# EAGLE board mrShark 03.a (EAGLE 5.11)
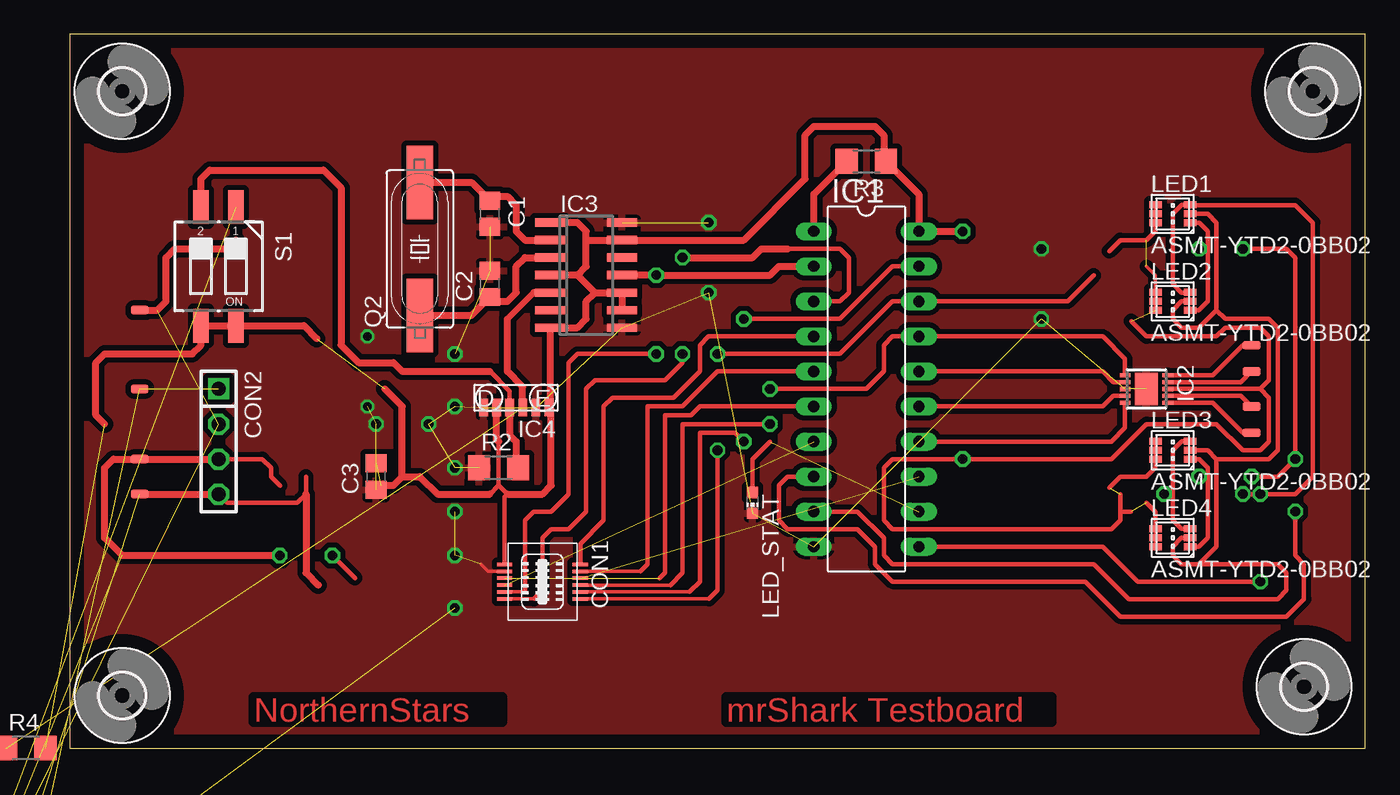
[diagram p0: board, top side]
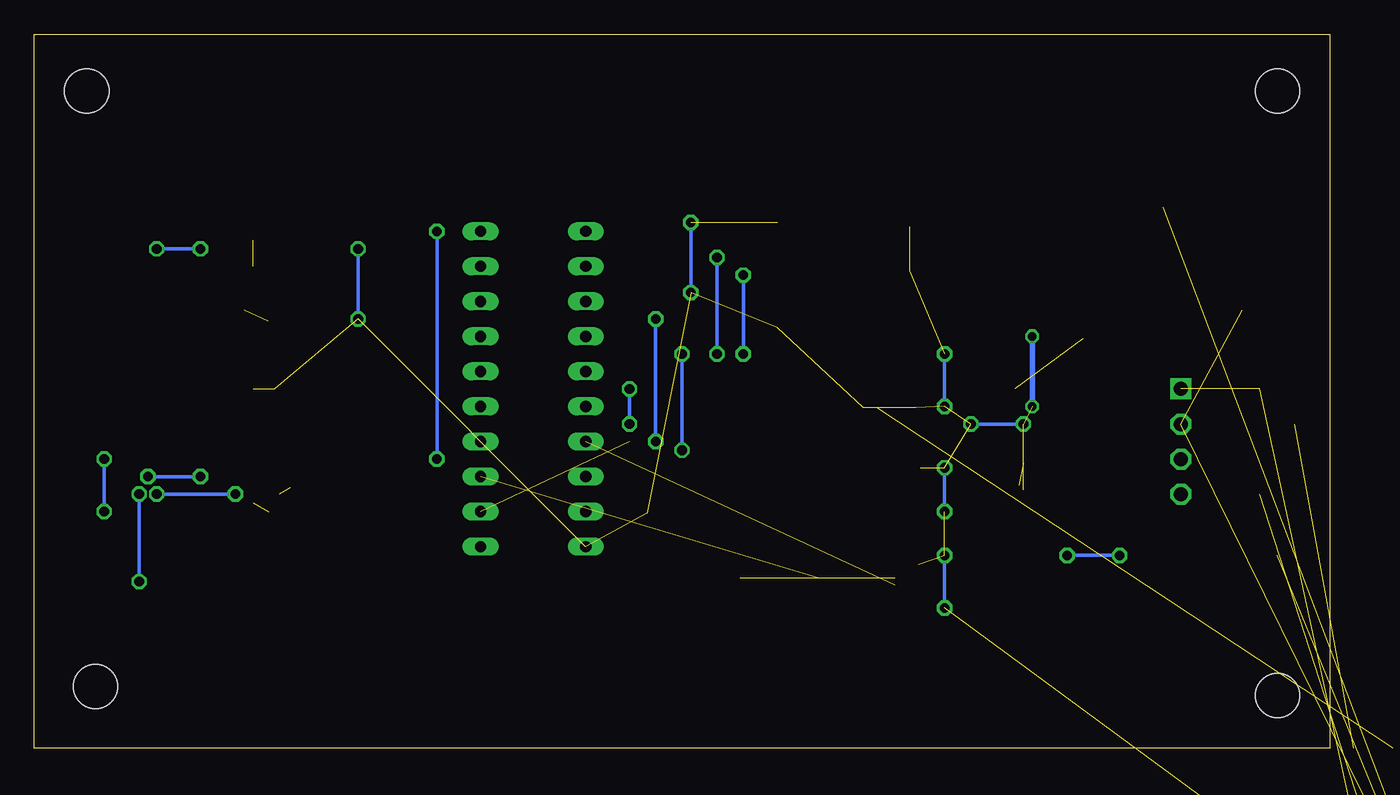
[diagram p1: board, bottom side, seen from below]

Size 93.96 x 51.74 mm. Coordinates in mm from the lower left corner, seen from the top.
Outline: 0,0 93.96,0 93.96,51.74 0,51.74 0,0
Copper layers (1*16): Top 0.035mm / dielectric 1.5mm / Bottom 0.035mm
Design rules "default": minimum track width 10mil, minimum drill 24mil, track to track 8mil, track to pad 8mil, pad to pad 8mil, via to via 8mil, smd to smd 8mil, copper to edge 40mil, drill to drill 8mil, minimum pad ring 10mil, minimum via ring 8mil, stop-mask expansion 4mil, vias tented up to drill 0mil, thermal gap 10mil

## Footprints (pad centres in the part's own frame; a part is rotated, then mirrored left to right if it is on the bottom)
SMD0,635-1,27 = smd 0.635 x 1.27: P$1 0,0
C0805 = smd 1.3 x 1.5: 1 -0.95,0; 2 0.95,0
DF23C-12DS = smd 0.25 x 1.1: 1 -1.25,-2.75; 2 -0.75,-2.75; 3 -0.25,-2.75; 4 0.25,-2.75; 5 0.75,-2.75; 6 1.25,-2.75; 7 1.25,2.75; 8 0.75,2.75; 9 0.25,2.75; 10 -0.25,2.75; 11 -0.75,2.75; 12 -1.25,2.75
1X04 = drill 1.016 square: 1 -3.81,0 | drill 1.016 octagon: 2 -1.27,0; 3 1.27,0; 4 3.81,0
SOT363_PHILIPS = smd 0.4 x 0.8: 1 -0.65,-0.8; 2 0,-0.8; 3 0.65,-0.8; 4 0.65,0.8; 5 0,0.8; 6 -0.65,0.8
3,2 = hole 3.2: 0,0
DIL20 = drill 0.813 long: 1 -11.43,-3.81; 2 -8.89,-3.81; 3 -6.35,-3.81; 4 -3.81,-3.81; 5 -1.27,-3.81; 6 1.27,-3.81; 7 3.81,-3.81; 8 6.35,-3.81; 9 8.89,-3.81; 10 11.43,-3.81; 11 11.43,3.81; 12 8.89,3.81; 13 6.35,3.81; 14 3.81,3.81; 15 1.27,3.81; 16 -1.27,3.81; 17 -3.81,3.81; 18 -6.35,3.81; 19 -8.89,3.81; 20 -11.43,3.81
DFN10-3X3 = smd 0.3 x 0.85: 1 -1,-1.55; 2 -0.5,-1.55; 3 0,-1.55; 4 0.5,-1.55; 5 1,-1.55; 6 1,1.55; 7 0.5,1.55; 8 0,1.55; 9 -0.5,1.55; 10 -1,1.55 | smd 2.38 x 1.65: EXP 0,0
SO-14 = smd 0.6 x 2.2: 1 -3.81,-2.6; 2 -2.54,-2.6; 3 -1.27,-2.6; 4 0,-2.6; 5 1.27,-2.6; 6 2.54,-2.6; 7 3.81,-2.6; 8 3.81,2.6; 9 2.54,2.6; 10 1.27,2.6; 11 0,2.6; 12 -1.27,2.6; 13 -2.54,2.6; 14 -3.81,2.6
TFBS4711 = smd 0.635 x 1.27: 1 -2.38,0.72; 2 -1.43,0.72; 3 -0.48,0.72; 4 0.47,0.72; 5 1.42,0.72; 6 2.37,0.72
PLCC6 = smd 0.9 x 0.5: 1 1.25,-0.65; 2 1.25,0; 3 1.25,0.65; 4 -1.25,0.65; 5 -1.25,0; 6 -1.25,-0.65
CHIP-LED0603 = smd 0.8 x 0.8: A 0,-0.75; C 0,0.75
HC49UP = smd 5.334 x 1.93: 1 -4.826,0; 2 4.826,0
R1206 = smd 1.6 x 1.803: 1 -1.422,0; 2 1.422,0
CTS-219-02 = smd 1.13 x 2.44: 1 -1.27,-4.3; 2 1.27,-4.3; 3 1.27,4.3; 4 -1.27,4.3

## Placement (x,y rotation side)
BAT1+  [SMD0,635-1,27]  5.08,20.95 90 top
BAT1-  [SMD0,635-1,27]  5.08,18.41 90 top
BAT2+  [SMD0,635-1,27]  5.08,31.75 270 top
BAT2-  [SMD0,635-1,27]  5.08,26.04 90 top
C1  18p  [C0805]  30.48,38.73 270 top
C2  18p  [C0805]  30.48,33.66 90 top
C3  100n  [C0805]  22.23,19.68 90 top
CON1  DF-23C-12DS-0.5V  [DF23C-12DS]  34.29,12.06 270 top
CON2  SQT-104-01-L-S  [1X04]  10.79,22.23 270 top
D1  BAS70-07S  [SOT363_PHILIPS]  -4.45,-6.99 0 top  (outside the outline)
D2  BAS70-07S  [SOT363_PHILIPS]  -4.45,-13.97 0 top  (outside the outline)
H1  MOUNT-HOLE3.2  [3,2]  89.53,4.45 0 top
H2  MOUNT-HOLE3.2  [3,2]  3.81,3.81 0 top
H3  MOUNT-HOLE3.2  [3,2]  3.81,47.62 0 top
H4  MOUNT-HOLE3.2  [3,2]  90.17,47.62 0 top
IC1  TINY4313PU  [DIL20]  57.78,26.04 270 top
IC2  A3901SEJTR-T  [DFN10-3X3]  78.11,26.04 270 top
IC3  MCP2120-I/SL  [SO-14]  37.47,34.29 270 top
IC4  TFBS4711-TR1  [TFBS4711]  32.38,25.4 180 top
LED1  ASMT-YTD2-0BB02  [PLCC6]  80.01,38.73 0 top
LED2  ASMT-YTD2-0BB02  [PLCC6]  80.01,32.38 0 top
LED3  ASMT-YTD2-0BB02  [PLCC6]  80.01,21.59 0 top
LED4  ASMT-YTD2-0BB02  [PLCC6]  80.01,15.24 0 top
LED_STAT  green  [CHIP-LED0603]  49.53,17.78 180 top
MOTOR_L+  [SMD0,635-1,27]  85.72,29.21 90 top
MOTOR_L-  [SMD0,635-1,27]  85.72,27.3 90 top
MOTOR_R+  [SMD0,635-1,27]  85.72,24.77 90 top
MOTOR_R-  [SMD0,635-1,27]  85.72,22.86 90 top
Q2  14.7456MHz  [HC49UP]  25.4,36.2 90 top
R2  1k  [R1206]  31.11,20.32 0 top
R3  1k  [R1206]  57.78,42.55 180 top
R4  1k  [R1206]  -3.17,0 0 top
S1  MCEMR-02-T  [CTS-219-02]  10.79,34.92 180 top

## Library data of the parts
BAT1+ BAT1- BAT2+ BAT2- MOTOR_L+ MOTOR_L- MOTOR_R+ MOTOR_R- = wirepad
C1-C3 R2-R4 = rcl
CON1 = con-hirose
CON2 = pinhead-2mm
D1 D2 = diode
H1-H4 = holes
IC1 = avr-6
IC2 = allegro
IC3 = microchip
IC4 = vishay
LED1-LED4 LED_STAT = led
Q2 = crystal
S1 = switch-dil

## Nets
BAT1+: BAT1+.P$1 CON2.3 D1.1
BAT1-: BAT1-.P$1 CON2.4 D2.6
BAT2+: BAT2+.P$1 CON2.2 D1.4
BAT2-: BAT2-.P$1 CON2.1 D2.3
GND: C1.2 C2.2 C3.1 CON1.2 D2.1 D2.4 IC1.10 IC2.3 IC2.EXP IC3.8 IC3.14 IC4.2 IC4.6 LED_STAT.C R2.1
INT0: CON1.3 IC1.6
INT1: CON1.4 IC1.7
LED_B: IC1.8 LED1.1 LED2.1 LED3.1 LED4.1
LED_G: IC1.9 LED1.2 LED2.2 LED3.2 LED4.2
LED_R: IC1.11 LED1.3 LED2.3 LED3.3 LED4.3
LED_STAT: IC1.12 LED_STAT.A
MISO: CON1.7 IC1.18
MOSI/MOTOR_L_DIR: CON1.9 IC1.17 IC2.1
MOTOR_L+: IC2.10 MOTOR_L+.P$1
MOTOR_L-: IC2.9 MOTOR_L-.P$1
MOTOR_L_PWM: IC1.16 IC2.2
MOTOR_R+: IC2.7 MOTOR_R+.P$1
MOTOR_R-: IC2.6 MOTOR_R-.P$1
MOTOR_R_DIR: IC1.14 IC2.5
MOTOR_R_PWM: IC1.15 IC2.4
N$1: C2.1 IC3.3 Q2.1
N$2: C1.1 IC3.2 Q2.2
N$4: IC1.1 R3.2
PA0: CON1.11 IC1.5
PA1: CON1.12 IC1.4
PB1: CON1.10 IC1.13
RXD: CON1.5 IC1.2 IC3.11
RXIR: IC3.5 IC4.3 R4.1
SCK: CON1.8 IC1.19
T_IR: IC4.4 R2.2 S1.2
TXD: CON1.6 IC1.3
VBAT: D1.3 D1.6 S1.1
VCC: C3.2 CON1.1 IC1.20 IC2.8 IC3.1 IC3.4 IC3.7 IC3.9 IC3.10 IC3.13 IC4.1 IC4.5 LED1.4 LED1.5 LED1.6 LED2.4 LED2.5 LED2.6 LED3.4 LED3.5 LED3.6 LED4.4 LED4.5 LED4.6 R3.1 R4.2 S1.3 S1.4

## Tracks (layer width: path | path; a pad name or v marks a point on that pad's centre or on a via)
BAT1+  (via drill 0.7)  (1 unrouted)
  Top 0.33: CON2.3 13.97,20.95 14.61,20.32 14.61,19.68 15.26,19.04 | v19.05,13.97 20.7,12.31
  Top 0.508: CON2.3 BAT1+.P$1 3.17,20.95 2.54,20.32 2.54,15.24 3.81,13.97 v15.24,13.97
  Bottom 0.254: v15.24,13.97 v19.05,13.97
BAT1-  (1 unrouted)
  Top 0.33: 17.14,19.68 17.14,18.41 16.51,17.78 11.43,17.78 CON2.4
  Top 0.508: BAT1-.P$1 CON2.4 | 17.14,18.41 17.14,12.7 18.03,11.81
BAT2+  (2 unrouted)
  Top 0.508: BAT2+.P$1 6.35,31.75 6.99,32.38 6.99,35.56 7.62,36.2 11.43,36.2 12.06,36.83
BAT2-  (2 unrouted)
GND  (via drill 0.6, 0.7)  (21 unrouted)
  Top 0.254: CON1.2 30.36,12.81 29.84,13.34
  Bottom 0.254: v22.23,23.5 v26.04,23.5 | v27.94,24.77 v27.94,28.57 | v27.94,10.16 v27.94,13.97 | v70.48,31.11 v70.48,36.2 | v46.35,33.02 v46.35,38.1 | v27.94,17.14 v27.94,20.32
  Bottom 0.406: v21.59,24.77 v21.59,29.84
  pour Top (isolate 0.381): 0,0 0,52.07 93.98,52.07 93.98,0
INT0  (1 unrouted)
  Top 0.33: IC1.6 45.72,24.77 45.09,24.13 43.18,24.13 43.18,12.7 42.8,12.31
INT1  (1 unrouted)
LED_B  (via drill 0.7)
  Top 0.254: 81.28,31.75 LED2.1 | 81.28,14.61 LED4.1 | v81.92,36.2 82.55,36.2 | v81.92,19.68 82.55,19.68
  Top 0.33: LED1.1 81.93,38.09 82.55,37.47 82.55,36.2 82.55,32.38 81.92,31.75 81.28,31.75 | 81.28,14.61 81.92,14.61 82.55,15.24 82.55,19.68 82.55,20.32 81.93,20.94 LED3.1 | v85.72,19.68 87.63,19.68 v88.9,20.95 88.9,35.56 88.27,36.2 v85.09,36.2 | v88.9,17.14 88.9,13.97 89.53,13.34 89.53,10.79 88.27,9.53 76.2,9.53 73.66,12.06 59.69,12.06 58.42,13.34 58.42,14.61 57.15,15.88 52.07,15.88 51.44,16.51 51.44,19.05 52.07,19.68 IC1.8
  Bottom 0.254: v85.09,36.2 v81.92,36.2 | v85.72,19.68 v81.92,19.68 | v88.9,17.14 v88.9,20.95
LED_G
  Top 0.33: LED1.2 82.55,38.73 83.19,38.1 83.19,31.75 | LED2.2 80.64,32.38 80.01,31.75 80.01,31.11 80.64,30.48 81.92,30.48 83.19,31.75 | 83.19,20.95 83.19,14.61 81.92,13.34 | 81.92,13.34 80.64,13.34 80.01,13.97 80.01,14.61 80.64,15.24 LED4.2 | 83.19,31.75 83.82,31.11 87,31.11 87.63,30.48 87.63,21.59 87,20.95 83.19,20.95 | LED3.2 82.55,21.59 83.19,20.95 | IC1.9 57.15,17.14 59.05,15.24 59.05,13.97 59.69,13.34 74.3,13.34 76.83,10.79 87.63,10.79 88.27,11.43 88.27,12.7 87.63,13.34 81.92,13.34
LED_R  (via drill 0.7)
  Top 0.254: 81.25,33.02 LED2.3 | 80.63,15.89 80.64,15.88 81.25,15.88 LED4.3 | v79.38,18.41 80.01,18.41 | 81.28,39.37 LED1.3
  Top 0.33: LED1.3 80.66,39.38 80.01,38.73 80.01,33.66 80.64,33.02 81.25,33.02 | LED3.3 80.66,22.24 80.01,21.59 80.01,18.41 80.01,16.51 80.63,15.89 LED4.3 | IC1.11 74.93,14.61 77.47,12.06 v86.36,12.06 | v85.09,18.41 v86.36,18.41 88.9,18.41 90.17,19.68 90.17,38.1 88.9,39.37 81.28,39.37
  Bottom 0.254: v85.09,18.41 v79.38,18.41 | v86.36,12.06 v86.36,18.41
LED_STAT  (1 unrouted)
  Top 0.33: 50.8,22.23 49.53,20.95 LED_STAT.A
MISO  (via drill 0.7)
  Top 0.254: CON1.7 46.38,10.81
  Top 0.33: 74.28,34.27 72.39,32.38 IC1.18 59.69,32.38 55.88,28.57 v46.99,28.57 | v46.99,21.59 46.99,11.43 46.38,10.81
  Bottom 0.254: v46.99,21.59 v46.99,28.57
MOSI/MOTOR_L_DIR  (via drill 0.7)
  Top 0.254: CON1.9 43.56,11.81
  Top 0.33: IC2.1 76.56,28.22 74.93,29.84 IC1.17 59.69,29.84 59.05,29.21 59.05,27.3 57.78,26.04 v50.8,26.04 | v50.8,23.5 44.45,23.5 44.45,12.7 43.56,11.81
  Bottom 0.254: v50.8,23.5 v50.8,26.04
MOTOR_L+
  Top 0.254: 85.09,29.21 MOTOR_L+.P$1
  Top 0.33: IC2.10 82.92,27.04 85.09,29.21
MOTOR_L-
  Top 0.33: IC2.9 84.95,26.54 MOTOR_L-.P$1
MOTOR_L_PWM
  Top 0.33: IC2.2 75.7,26.54 74.93,27.3 IC1.16
MOTOR_R+
  Top 0.33: IC2.7 84.95,25.54 MOTOR_R+.P$1
MOTOR_R-
  Top 0.254: 85.09,22.86 MOTOR_R-.P$1
  Top 0.33: IC2.6 82.92,25.04 85.09,22.86
MOTOR_R_DIR
  Top 0.33: IC2.5 76.56,23.21 75.56,22.23 IC1.14
MOTOR_R_PWM
  Top 0.33: IC2.4 75.7,25.54 74.93,24.77 IC1.15
N$1
  Top 0.508: Q2.1 29.14,31.37 C2.1 30.8,32.38 31.75,32.38 32.38,33.02 32.38,34.92 33.02,35.56 IC3.3
N$2
  Top 0.508: Q2.2 29.14,41.02 C1.1 30.8,40.01 31.75,40.01 32.38,39.37 32.38,37.47 33.02,36.83 IC3.2
N$4
  Top 0.508: IC1.1 53.98,40.16 R3.2
PA0
  Top 0.254: CON1.11 41.39,12.81
  Top 0.33: IC1.5 46.99,27.3 44.45,24.77 41.91,24.77 41.91,13.34 41.39,12.81
PA1
  Top 0.33: CON1.12 37.04,14.81 38.73,16.51 38.73,24.77 39.37,25.4 43.81,25.4 45.72,27.3 45.72,29.21 46.35,29.84 IC1.4
PB1  (1 unrouted)
RXD  (via drill 0.7)
  Top 0.254: CON1.5 32.91,11.31 33.02,11.43
  Top 0.33: 33.02,11.43 33.02,16.51 33.66,17.14 34.92,17.14 36.2,18.41 36.2,27.94 36.83,28.57 v42.55,28.57
  Top 0.508: IC1.2 51.44,34.92 50.8,34.29 v42.55,34.29 IC3.11
  Bottom 0.254: v42.55,28.57 v42.55,34.29
RXIR  (1 unrouted)
  Top 0.381: 31.75,31.11 33.66,33.02
  Top 0.508: 33.66,33.02 IC3.5 | 31.75,31.11 31.75,27.3 32.87,26.19 IC4.3
SCK  (via drill 0.7)
  Top 0.254: CON1.8 44.97,11.31
  Top 0.33: v48.9,22.23 48.26,22.86 45.72,22.86 45.72,12.06 44.97,11.31 | v48.9,31.11 55.88,31.11 59.69,34.92 IC1.19
  Bottom 0.254: v48.9,22.23 v48.9,31.11
T_IR
  Top 0.33: IC4.4 31.91,25.87 30.48,27.3
  Top 0.508: IC4.4 31.91,22.7 32.38,22.23 32.38,20.47 R2.2 | 30.48,27.3 24.13,27.3 23.5,27.94 20.95,27.94 19.68,29.21 19.68,40.64 18.41,41.91 10.16,41.91 9.53,41.27 S1.2
TXD  (via drill 0.7)
  Top 0.254: CON1.6 33.67,10.81
  Top 0.33: 52.07,36.2 55.88,36.2 56.52,35.56 56.52,33.02 55.88,32.38 IC1.3 | 33.67,10.81 34.29,11.43 34.29,15.24 34.92,15.88 36.2,15.88 37.47,17.14 37.47,26.04 38.1,26.67 43.18,26.67 44.45,27.94 v44.45,28.57
  Top 0.508: v44.45,35.56 49.53,35.56 50.16,36.2 52.07,36.2
  Bottom 0.254: v44.45,28.57 v44.45,35.56
VBAT  (2 unrouted)
VCC  (via drill 0.7)  (7 unrouted)
  Top 0.254: 34.92,24.52 IC4.1 | 76.2,18.41 76.22,18.43 | 31.75,18.41 31.54,18.2 | 78.74,38.06 LED1.6 LED1.5 LED1.4 | 78.11,34.92 78.74,34.29 78.74,33.05 LED2.4 LED2.5 LED2.6 | 78.74,20.92 LED3.6 LED3.5 LED3.4 | LED4.6 LED4.5 LED4.4 78.74,15.91
  Top 0.33: 76.2,17.14 76.2,18.41 | 76.2,17.14 76.98,17.14 | 31.11,19.05 31.11,22.23 | 31.11,19.05 31.75,18.41 | 86.36,26.04 IC2.8 | 86.36,26.04 87,26.67 87,29.84 86.36,30.48 83.82,30.48 83.19,29.84 78.11,29.84 77,30.95 | 76.2,17.14 76.2,16.51 75.56,15.88 59.69,15.88 59.05,16.51 59.05,20.32 59.69,20.95 v64.77,20.95 75.56,20.95 78.11,23.5 83.19,23.5 85.09,21.59 86.36,21.59 87,22.23 87,25.4 86.36,26.04 | 31.54,18.2 CON1.1 | 30.48,18.41 31.11,19.05 | 75.4,36.03 76.2,36.83 78.11,36.83 78.74,37.47 78.74,38.06 | 75.4,18.89 76.2,19.68 78.11,19.68 78.74,20.32 78.74,20.92 | 78.11,17.78 78.74,17.14 78.74,15.91
  Top 0.508: 2.54,23.5 1.91,24.13 1.91,27.94 2.54,28.57 8.89,28.57 9.53,29.21 S1.3 S1.4 17,30.62 17.93,29.69 | 22.86,26.04 24.13,24.77 24.13,19.68 | 24.13,19.68 23.5,19.05 22.54,19.05 | 36.83,34.29 IC3.4 | 38.1,33.02 36.83,34.29 | 38.1,33.02 IC3.10 IC3.9 | IC3.1 36.83,38.1 37.47,37.47 37.47,36.83 | 37.47,36.83 37.47,34.92 36.83,34.29 | 37.47,36.83 IC3.13 48.9,36.83 53.34,41.27 53.34,44.45 53.98,45.09 58.42,45.09 59.05,44.45 59.05,42.7 R3.1 61.59,40.16 IC1.20 v64.77,37.47 | 38.1,33.02 37.47,32.38 37.47,31.11 36.83,30.48 IC3.7 34.87,24.78 IC4.1 | IC4.5 30.96,22.38 31.11,22.23 | 31.75,18.41 34.29,18.41 34.92,19.05 34.92,24.52 | 24.13,19.68 25.4,19.68 26.67,18.41 30.48,18.41
  Bottom 0.254: v64.77,37.47 v64.77,20.95

## Text on the board
Top: NorthernStars | mrShark Testboard